# Altium PCB featherULP-2.PcbDoc
Units mm, origin at the board's own origin, x right, y up, seen from the top; angles counter-clockwise.
Board outline 50.04 x 22.86 mm, 2 copper layers (Top Layer, Bottom Layer); 28 components, 30 nets, 132 pads, 49 vias.
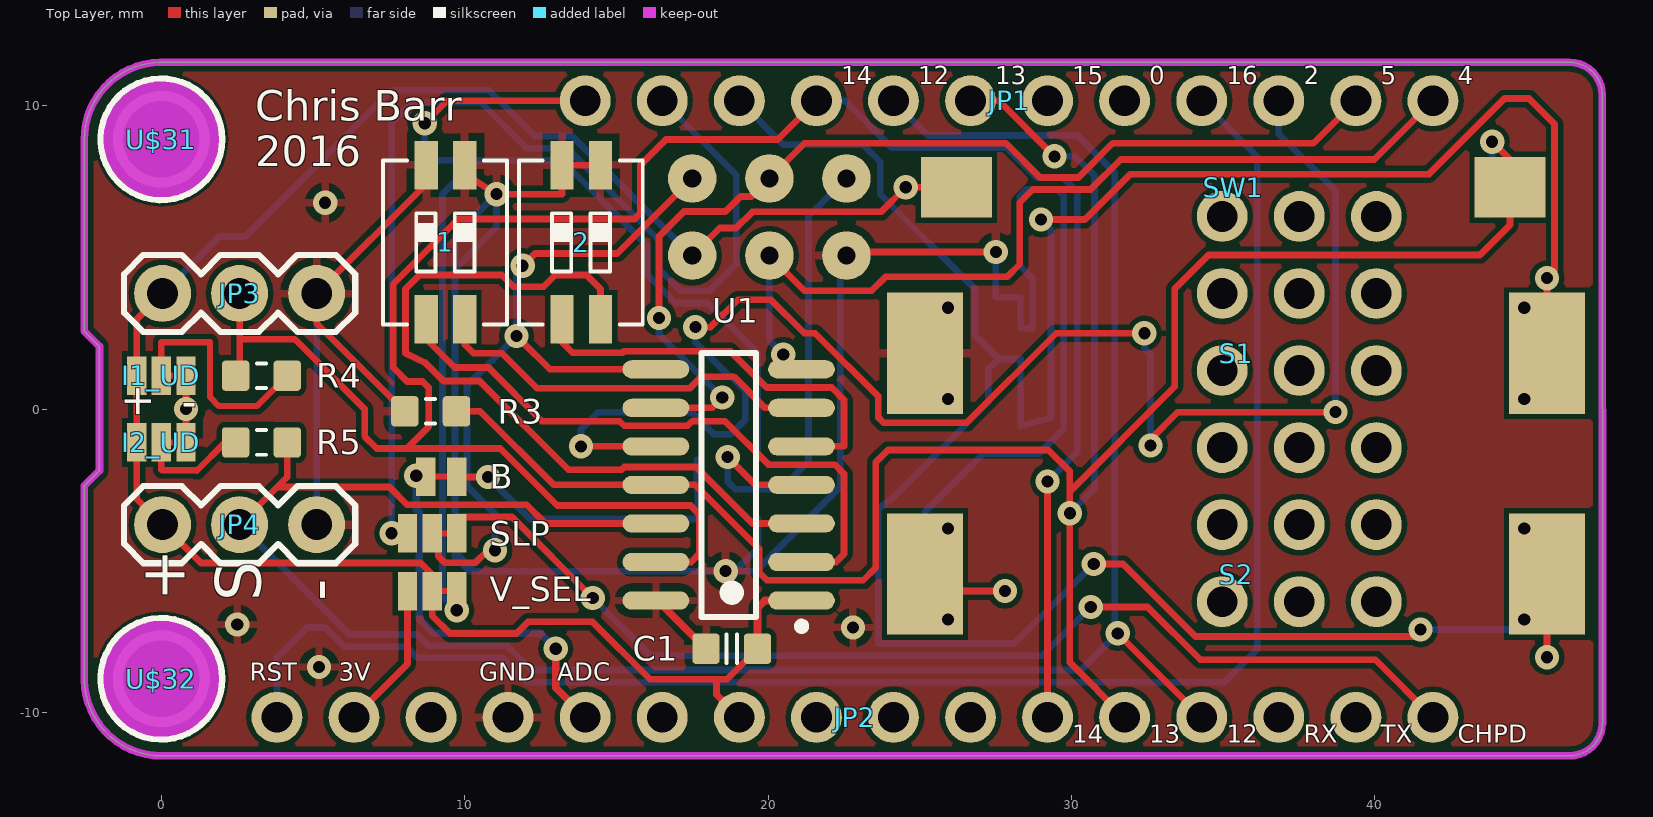
[diagram p0: Top Layer view]
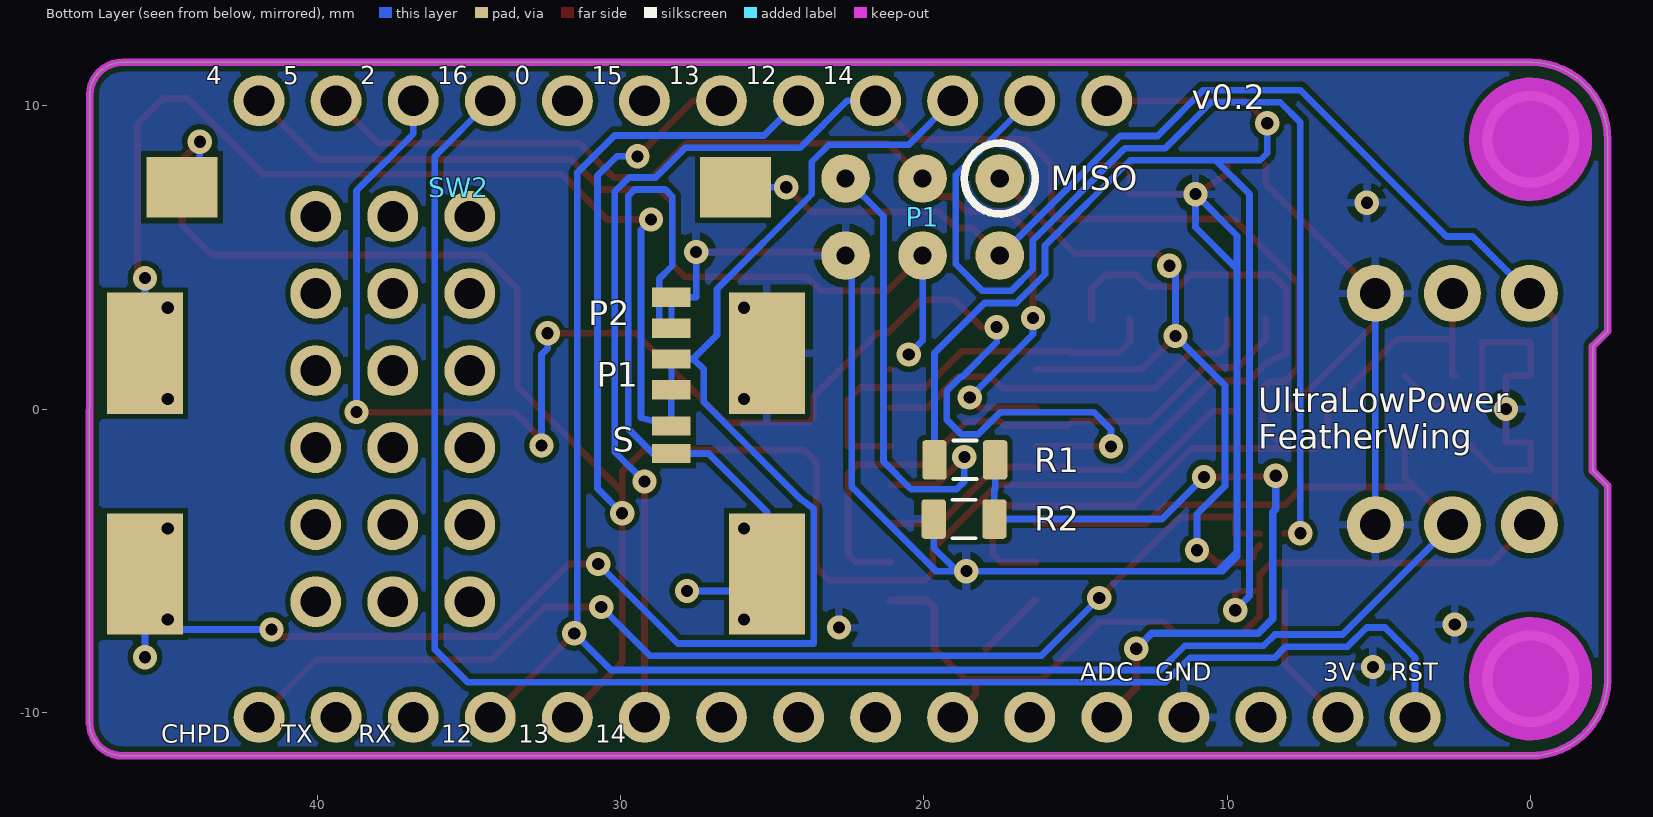
[diagram p1: Bottom Layer view, seen from below]

## Layer stack, top to bottom
Top Solder: solder mask 0.0102, Solder Resist, Dk 3.5
Top Layer: signal copper 0.0356
Dielectric1: dielectric 0.32, FR-4, Dk 4.8
Bottom Layer: signal copper 0.0356
Bottom Solder: solder mask 0.0102, Solder Resist, Dk 3.5

## Board outline
-2.54,-8.929 -2.54,-2.53 -2.04,-2.03 -2.04,2.07 -2.54,2.57 -2.54,8.87 cw(c0,8.89) -0.039,11.43 46.4,11.43 cw(c46.409,10.344) 47.494,10.361 47.5,-10.361 47.494,-10.361 cw(c46.409,-10.344) 46.4,-11.43 0.02,-11.43 cw(c0,-8.89)

## Design rules (kind name [scope] priority, off if disabled: settings)
Clearance [All] p1: gap=0.18
FabricationTestPointUsage TestPointUsage [All] p1: valid=0 allowmultiple=FALSE
FabricationTestpoint Testpoint [All] p1: side=3 testpointundercomponent=TRUE minsize=1.016 maxsize=2.54 preferedsize=1.524 minholesize=0 maxholesize=1.016 preferedholesize=0.813 testpointgrid=0.025 allowsidetop=TRUE allowsidebottom=TRUE usegrid=TRUE gridtolerance=0
HoleSize [All] p1: absolutevalues=TRUE maxlimit=3.5 minlimit=0.025 maxpercent=80.000 minpercent=20.000
PolygonConnect [All] p1: connectstyle=Relief reliefconductorwidth=0.254 reliefentries=4 polygonreliefangle="90 Angle" airgapwidth=0.254
RoutingVias [All] p1: holewidth=0.4 width=0.8 viastyle="Through Hole" minholewidth=0.25 minwidth=0.5 maxholewidth=1 maxwidth=1.4
SilkToSolderMaskClearance SilkscreenOverComponentPads [IsPad] p1: minsilkscreentomaskgap=0.254 clearancetoexposedcopper=TRUE
SolderMaskExpansion [All] p1: expansion=0.102
Width [All] p1: maxlimit=1 minlimit=0.2 preferedwidth=0.22 minimp=50.000000 maximp=50.000000 favimp=50.000000
26 further rules are at their usual default settings.

## Components (designator, comment, footprint, x,y, rotation, side; value= is the part's Value field where it differs from the comment)
1 "SMD dip switch 2 positions" CHS-02A 10,5.5 r180 top
2 "SMD dip switch 2 positions" CHS-02A 14.475,5.5 r180 top
B "JUMPER-PAD-2-NC_BY_TRACENO_SILK" PAD-JUMPER-2-NC_BY_TRACE_NO_SILK 9.225,-2.225 r180 top net-tie
C1 "approved sub OK" CAPC1608X90N 18.8,-7.9 r180 top
I1_UD "JUMPER-PAD-3-2OF3_NC_BY_TRACE_SMALL" PAD-JUMPER-3-2OF3_NC_BY_TRACE_YES_SILK_FULL_BOX 0,1.1 r0 top net-tie
I2_UD "JUMPER-PAD-3-2OF3_NC_BY_TRACE_SMALL" PAD-JUMPER-3-2OF3_NC_BY_TRACE_YES_SILK_FULL_BOX 0,-1.1 r0 top net-tie
JP1 "HEADER-1X12" 1X12_ROUND 27.94,10.16 r0 top locked
JP2 "HEADER-1X16ROUND" 1X16_ROUND 22.86,-10.16 r180 top locked
JP3 "Header 3Standard 3-pin 0.1\" header. Use with straight break away headers (SKU : PRT-00116), right angle break away headers (PRT-00553), swiss pins (PRT-00743), machine pins (PRT-00117), and female headers (PRT-00115). Molex polarized connector foot print use with SKU : PRT-08232 with associated crimp pins and housings." 1X03 5.12,3.81 r180 top
JP4 "Header 3Standard 3-pin 0.1\" header. Use with straight break away headers (SKU : PRT-00116), right angle break away headers (PRT-00553), swiss pins (PRT-00743), machine pins (PRT-00117), and female headers (PRT-00115). Molex polarized connector foot print use with SKU : PRT-08232 with associated crimp pins and housings." 1X03 5.12,-3.81 r180 top
P1 "JUMPER-PAD-2-NC_BY_TRACENO_SILK" PAD-JUMPER-2-NC_BY_TRACE_NO_SILK 28.321,1.143 r90 bottom net-tie
P1 "ICSP" "ICSP Pads - SMD" 17.5,7.6 r270 bottom
P2 "JUMPER-PAD-2-NC_BY_TRACENO_SILK" PAD-JUMPER-2-NC_BY_TRACE_NO_SILK 28.321,3.175 r90 bottom net-tie
R1 "Thick Film" RESC2012X70N 18.65,-1.675 r180 bottom
R2 "Thick Film" RESC2012X70N 18.675,-3.625 r0 bottom
R3 "Thick Film" RESC1608X55N 8.875,-0.075 r180 top
R4 "Thick Film" RESC1608X55N 3.3,1.1 r0 top
R5 "Thick Film" RESC1608X55N 3.3,-1.1 r180 top
S "JUMPER-PAD-2-NO" PAD-JUMPER-2-NO_NO_SILK 28.321,-1.016 r90 bottom net-tie
S1 "Solar Cell" "SOLAR CELL IXYS  KXOB22-01X8L-ND" 45.672,1.837 r180 top locked
S2 "Solar Cell" "SOLAR CELL IXYS  KXOB22-01X8L-ND" 45.672,-5.437 r180 top locked
SLP "JUMPER-PAD-3-2OF3_NC_BY_TRACE_SMALL" PAD-JUMPER-3-2OF3_NC_BY_TRACE_YES_SILK_FULL_BOX 8.925,-4.1 r0 top net-tie
SW1 "Reed Switch" "Reed Switch MDSM-4" 44.45,7.31 r180 top
SW2 "Reed Switch" "Reed Switch MDSM-4" 44.45,7.31 r180 bottom
U1 "ATtiny44A-SSU" 14S1_N 18.7,-2.5 r180 top
U$31 "MOUNTINGHOLE2.5" MOUNTINGHOLE_2.5_PLATED 0,8.89 r270 top
U$32 "MOUNTINGHOLE2.5" MOUNTINGHOLE_2.5_PLATED 0,-8.89 r270 top
V_SEL "JUMPER-PAD-3-2OF3_NC_BY_TRACE_SMALL" PAD-JUMPER-3-2OF3_NC_BY_TRACE_YES_SILK_FULL_BOX 8.925,-6 r0 top net-tie

## Footprints (in the part's own frame and the unit in brackets; to place one, negate y for a bottom-side part, rotate by r counter-clockwise, add the part's x,y. Pads: shape width x height; smd on the part's side, far side on the other; paste and mask are expansions set on the pad)
1X03 [mil]
  round 74 hole 40: 1(0,0) 2(100,0) 3(200,0)
  silkscreen extent -50,-50 250,50
1X12_ROUND [mil] "1X12_ROUND"
  round 66 hole 40: 1(-550,0) 2(-450,0) 3(-350,0) 4(-250,0) 5(-150,0) 6(-50,0) 7(50,0) 8(150,0) 9(250,0) 10(350,0) 11(450,0) 12(550,0)
1X16_ROUND [mil] "1X16_ROUND"
  round 66 hole 40: 1(-750,0) 2(-650,0) 3(-550,0) 4(-450,0) 5(-350,0) 6(-250,0) 7(-150,0) 8(-50,0) 9(50,0) 10(150,0) 11(250,0) 12(350,0) 13(450,0) 14(550,0) 15(650,0) 16(750,0)
14S1_N [mm] "SOIC, 14-Leads, Body 8.7x3.9mm, Pitch 1.27mm, IPC Medium Density"
  oval 2.2x0.6 smd: 1(-2.4,3.81) 2(-2.4,2.54) 3(-2.4,1.27) 4(-2.4,0) 5(-2.4,-1.27) 6(-2.4,-2.54) 7(-2.4,-3.81) 8(2.4,-3.81) 9(2.4,-2.54) 10(2.4,-1.27) 11(2.4,0) 12(2.4,1.27) 13(2.4,2.54) 14(2.4,3.81)
  silkscreen extent -2.53,-4.35 0.9,4.78, body extent -1.99,-4.37 1.99,4.37, height 1.75
CAPC1608X90N [mm] "Chip Capacitor, Body 1.6x0.8mm, EIA 0603, IPC Medium Density"
  round 0.254 on Mech15: 0(0,0)
  rrect25% 0.9x1 smd: 1(-0.85,0) 2(0.85,0)
  Top Layer pour cut-out: -0.6,0.5 -0.4,0.7 0.4,0.7 0.6,0.5 0.6,-0.5 0.4,-0.7 -0.4,-0.7 -0.6,-0.5
  silkscreen extent -0.18,-0.48 0.18,0.48, body extent -0.85,-0.45 0.85,0.45, height 0.89
CHS-02A [mil]
  rect 30x63 smd: 1(0,-100) 2(50,-100) 3(50,100) 4(0,100)
  silkscreen extent -55,-106 106,107
"ICSP Pads - SMD" [mm]
  round 1.6 hole 0.6: 1(0,0) 2(2.54,0) 3(0,-2.54) 4(2.54,-2.54) 5(0,-5.08) 6(2.54,-5.08)
  silkscreen extent -1.17,-1.17 1.17,1.17
MOUNTINGHOLE_2.5_PLATED [mil] "MOUNTINGHOLE_2.5_PLATED"
  round 126 hole 99: P$1(0,0)
  Top Layer keep-out circle w80: c0,0 r40
  Bottom Layer keep-out circle w80: c0,0 r40
  silkscreen extent -79,-79 79,79
PAD-JUMPER-2-NC_BY_TRACE_NO_SILK [mil]
  rect 25x50 smd: 1(-20,0) 2(20,0)
  Top Layer lines w8: 15,0 -15,0
PAD-JUMPER-2-NO_NO_SILK [mm]
  rect 0.635x1.27 smd: 1(-0.45,0) 2(0.457,0)
PAD-JUMPER-3-2OF3_NC_BY_TRACE_YES_SILK_FULL_BOX [mil]
  rect 25x50 smd: 1(-32,0) 2(0,0) 3(32,0)
  Top Layer lines w8: 0,0 25,0
"Reed Switch MDSM-4" [mm]
  rect 2.34x2 smd: 0(0,0) 1(18.25,0)
RESC1608X55N [mm] "Chip Resistor, Body 1.6x0.8mm, EIA 0603, IPC Medium Density"
  round 0.254 on Mech15: 0(0,0)
  rrect25% 0.9x1 smd: 1(-0.85,0) 2(0.85,0)
  Top Layer pour cut-out: -0.6,0.5 -0.4,0.7 0.4,0.7 0.6,0.5 0.6,-0.5 0.4,-0.7 -0.4,-0.7 -0.6,-0.5
  silkscreen extent -0.15,-0.41 0.15,0.41, body extent -0.87,-0.47 0.88,0.48, height 0.54
RESC2012X70N [mm] "Chip Resistor, Body 2.0x1.2mm, EIA 0805, IPC Medium Density"
  round 0.254 on Mech15: 0(0,0)
  rrect25% 0.8x1.3 smd: 1(-1,0) 2(1,0)
  Top Layer pour cut-out: -0.725,0.65 -0.525,0.85 0.525,0.85 0.725,0.65 0.725,-0.65 0.525,-0.85 -0.525,-0.85 -0.725,-0.65
  silkscreen extent -0.38,-0.63 0.38,0.64, body extent -1.1,-0.67 1.1,0.68, height 0.69
"SOLAR CELL IXYS  KXOB22-01X8L-ND" [mm]
  rect 2.5x4 smd far side: +(0,0) -(20.5,0)
  rect 2.5x4 smd: +(0,0) -(20.5,0)
  body extent -0.75,-3.5 21.25,3.5, height 1.5

## Part data
1 2: library part 2-POS-DIP
C1: library part CAPC_100n_0603_X7R_50V_10%, "Capacitor SMD Cer 100nF 10% 50V X7R 0603"
JP2: "PIN HEADER"
JP3 JP4: library part M03PTH
P1: library part "Header 3X2", "Header, 3-Pin, Dual row"
R1: library part RES_1M_0805_5%, "Resistor SMD chip 1M Ohm 0.125W 5% 0805"
R2: library part RES_205K_0805_1%, "Resistor SMD chip 205k Ohm 0.125W 1% 0805"
R3 R4 R5: library part RES_10K_0603_5%, "Resistor SMD chip 10k Ohm 0.1W 5% 0603"
U1: "8-bit AVR Microcontroller,  20MHz, 1.8-5.5V, 4KB Flash, 256 Bytes EEPROM, 256 Bytes SRAM, 14-pin SOIC, Industrial Grade (-40°C to 85°C), Pb-Free"
U$31 U$32: "Mounting Hole   For #2 screws (0.086\"/2.18mm width, 0.094\"/2.4mm hole) use 2.5mm"

## Free pads (board coordinates)
  round 1.676 hole 1.016: ""(34.965,-6.35) ""(34.965,-3.81) ""(34.965,-1.27) ""(34.965,1.27) ""(34.965,3.81) ""(34.965,6.35) ""(37.505,-6.35) ""(37.505,-3.81) ""(37.505,-1.27) ""(37.505,1.27) ""(37.505,3.81) ""(37.505,6.35) ""(40.045,-6.35) ""(40.045,-3.81) ""(40.045,-1.27) ""(40.045,1.27) ""(40.045,3.81) ""(40.045,6.35)

## Via types
v1: diameter 0.8, hole 0.4, Top Layer to Bottom Layer, tented both sides, 49 vias

## Nets (pads, with @x,y where several pads share a name; then routed paths per layer and width w, separated by ;. In a path a pad name is that pad's centre, name@x,y a point inside that pad or via, vN(x,y) a via of type N, cw(c..) or ccw(c..) an arc to the next point about the centre after c; other vN are vias at no path point)
+3V3: JP2.15 V_SEL.1 | length 4.9
  Top Layer w0.22: JP2.15 8.112,-8.398 V_SEL.1
ADC: B.2 JP2.12 | length 12.3
  Top Layer w0.25: v1(13,-7.9) 13,-9.19 JP2.12
  Bottom Layer w0.25: v1(8.4,-2.2) 8.4,-3.3 8.5,-3.4 8.5,-6.913 8.972,-7.385 12.485,-7.385 v1(13,-7.9)
CH_PD: JP2.1 SLP.3 | length 36.8
  Top Layer w0.22: SLP.3 9.738,-3.559 11.554,-3.559 v1(14.221,-6.226) ; v1(30.633,-6.527) 32.509,-6.527 34.24,-8.258 40.008,-8.258 JP2.1
  Bottom Layer w0.22: v1(14.221,-6.226) 16.122,-8.127 29.033,-8.127 v1(30.633,-6.527)
EN: JP1.2 SLP.1 | length 35.6
  Top Layer w0.22: v1(7.591,-4.093) 8.112,-4.093 SLP.1
  Bottom Layer w0.22: v1(7.591,-4.093) 7.591,9.45 8.252,10.11 10.53,10.11 12.039,8.601 13.365,8.601 16.41,5.556 16.41,4.608 17.122,3.897 18.07,3.897 18.945,4.772 18.945,7.725 JP1.2
FEEDBACK: JP1.10 U1.10 | length 53
  Top Layer w0.22: v1(13.83,-1.23) U1.10 ; v1(17.6,2.7) 18.1,2.7 19,3.6 20.1,3.6 21.2,2.5 21.544,2.5 23.632,0.412 23.632,-0.283 23.802,-0.453 26.542,-0.453 29.495,2.5 v1(32.4,2.5) ; v1(32.6,-1.2) 32.6,-1 33.5,-0.1 v1(38.7,-0.1)
  Bottom Layer w0.22: v1(13.83,-1.23) 13.83,-0.67 14.4,-0.1 17.477,-0.1 18.202,-0.825 18.775,-0.825 19.25,-0.35 19.25,0.592 18.774,1.068 18.732,1.068 17.6,2.2 v1@17.6,2.5 ; v1(32.4,2.5) 32.4,2 32.6,1.8 v1(32.6,-1.2) v1@32.6,-1.5 ; JP1.10 36.83,9.07 38.7,7.2 v1(38.7,-0.1)
GND: 1.1 1.2 2.1 2.2 C1.2 I1_UD.3 I2_UD.3 JP2.13 JP3.1 JP4.1 P1.6 P2.2 R2.2 R3.2 S1.- U1.14 | length 85.9
  Top Layer w0.22: I2_UD.3 I1_UD.3 ; R3.2 5.12,2.83 JP3.1 8.73,7.42 1.2 ; 1.1 10,7.744 v1(11.046,7.083) ; v1(11.047,7.085) 13.205,7.085 2.2 2.1 ; U1.14 U1.14@16.36,-6.31 ; P1.6@22.878,5.178 v1(27.505,5.178)
  Top Layer w0.25: U1.14@16.36,-6.31 C1.2
  Bottom Layer w0.22: JP4.1 JP3.1 ; v1(11.047,7.085) v1(11.046,7.083) ; JP2.13 JP2.13@11.43,-9.63 ; R2.2 19.675,-4.575 v1@18.909,-5.341 ; P1.6 22.374,4.854 22.374,-2.569 19.601,-5.341 v1@18.909,-5.341 ; v1(27.505,5.178) 27.505,3.683 P2.2 ; 9.676,4.622 11.046,5.991 v1(11.046,7.083) ; 9.676,4.622 9.674,4.62 9.674,-4.859 10.157,-5.341 10.305,-5.341 ; 9.676,4.622 9.676,5.714 v1(11.046,7.083) ; 9.676,4.622 9.676,-4.713 10.305,-5.341 ; 10.305,-5.341 v1@18.909,-5.341
  other v1: 5.2,-8.5 22.8,-7.2 2.5,-7.1 18.6,-5.341 0.813,0 25.922,0.337 25.922,3.337 5.4,6.8
GPIO0: JP1.8
GPIO4/SDA: JP1.12 P1.4 U1.7 | length 29.8
  Top Layer w0.22: P1.4@19.86,5.06 P1.4 21.2,3.9 23.407,3.9 23.865,4.358 27.878,4.358 28.292,4.772 28.292,6.804 28.722,7.234 30.628,7.234 31.621,8.226 39.976,8.226 JP1.12 ; U1.7@21.087,1.31 U1.7
  Bottom Layer w0.22: P1.4 20.04,2.26 v1(20.5,1.8)
GPIO5/SCL: JP1.11 P1.3 U1.9 | length 34.7
  Top Layer w0.22: U1.9 18.15,0.04 v1(18.488,0.378) ; v1(16.4,3) 16.4,2.796 16.405,2.791 16.405,5.686 17.229,6.51 18.59,6.51 19.087,7.007 19.447,7.007 P1.3 21.2,8.76 27.836,8.76 28.962,7.634 30.228,7.634 31.354,8.76 37.97,8.76 JP1.11
  Bottom Layer w0.22: v1(16.4,3) 16.4,2.466 v1(18.488,0.378)
GPIO12/MISO: JP1.5 JP2.4 JP4.2 R5.1 U1.12 | length 75.2
  Top Layer w0.22: JP4.2 3.821,-2.569 ; R5.1 4.15,-2.24 3.821,-2.569 ; U1.12 12.659,-3.77 12.041,-3.153 8.099,-3.153 7.515,-2.569 3.821,-2.569 ; v1(31.521,-7.391) JP2.4
  Bottom Layer w0.22: JP4.2 6.2,-7.43 8.43,-7.43 8.8,-7.8 11.4,-7.8 12.2,-8.6 30.313,-8.6 v1@31.421,-7.492 ; JP1.5 25.272,9.018 30.2,9.018 31.418,7.8 31.421,7.8 v1@31.421,-7.492 ; v1(31.521,-7.391) v1@31.421,-7.492
GPIO13/MOSI: JP1.6 JP2.5 R3.1 SW1.0 SW2.0 U1.11 | length 83.3
  Top Layer w0.22: R3.1 10.512,-0.075 12.937,-2.5 U1.11 17.599,-2.5 19.707,-4.608 19.707,-5.388 19.961,-5.642 23.136,-5.642 23.543,-5.236 23.543,-1.756 23.949,-1.349 29.232,-1.349 29.943,-2.061 29.943,-2.721 ; JP1.6 27.607,10.16 v1(29.439,8.328) ; JP2.5 29.943,-8.353 ; v1(43.863,8.811) 44.45,8.223 SW1.0 44.45,6.071 43.456,5.077 34.515,5.077 33.398,3.959 33.398,0.733 29.943,-2.721 ; 29.943,-8.353 29.943,-2.721 ; 29.943,-8.353 v1(29.943,-3.432) 29.943,-2.721
  Bottom Layer w0.22: v1(29.439,8.328) 30.121,8.328 30.756,7.693 30.756,-2.619 v1(29.943,-3.432) ; v1(43.863,8.811) 43.863,7.31 SW2.0
GPIO14/SCK: JP1.4 JP2.6 JP3.2 R4.1 U1.13 | length 76.2
  Top Layer w0.22: R4.1 2.58,1.1 2.58,2.3 ; JP3.2 2.58,2.3 ; 7.099,-1.3 11.172,-1.3 13.05,-3.178 17.447,-3.178 17.726,-3.458 17.726,-4.778 17.464,-5.04 U1.13 ; JP1.4 20.317,8.887 16.634,8.887 15.796,8.049 15.796,6.461 15.596,6.262 9.786,6.262 7.642,4.119 7.642,1.368 8.099,0.911 8.607,0.911 8.811,0.708 8.811,-0.587 8.099,-1.299 7.099,-1.299 6.7,-0.9 6.7,0 4.4,2.3 2.58,2.3 ; JP2.6 v1(29.21,-2.388)
  Bottom Layer w0.22: JP1.4 22.534,10.16 24.087,8.607 27.873,8.607 28.847,7.634 29.72,7.634 30.191,7.163 30.191,-1.407 v1(29.21,-2.388)
GPIO15: JP1.7
GPIO16: JP1.9 JP2.16 | length 54.7
  Bottom Layer w0.22: JP2.16 3.81,-8.19 4.8,-7.2 5.404,-7.2 6.034,-7.83 8.077,-7.83 8.447,-8.2 11.234,-8.2 12.034,-9 35.044,-9 36.116,-7.928 36.116,8.334 JP1.9
MISO: P1.1@17.5,7.6 SLP.2 U1.8 | length 25.2
  Top Layer w0.22: SLP.2@8.925,-4.492 9.13,-4.697 9.13,-4.855 9.338,-5.063 10.358,-5.063 10.769,-4.651 v1(10.995,-4.651) ; v1(11.909,4.721) 12.316,5.128 15.028,5.128 P1.1@17.5,7.6 ; U1.8 12.806,1.31 v1@11.909,2.207 ; v1@11.909,2.207 v1(11.706,2.41) v1@11.909,2.207
  Bottom Layer w0.22: v1(10.995,-4.651) 10.995,-3.458 10.076,-2.539 10.076,0.78 v1(11.706,2.41) 11.706,4.518 v1(11.909,4.721)
NetB_1: B.1 R1.2 R2.1 | length 10.5
  Top Layer w0.22: B.1 9.733,-2.238 v1(10.766,-2.238)
  Bottom Layer w0.22: v1(10.766,-2.238) 12.153,-3.625 R2.1 17.675,-2.67 17.65,-2.645 R1.2
NetI1_UD_2: I1_UD.2 R4.2 | length 7.6
  Top Layer w0.203: I1_UD.2 0,2.2 1.6,2.2 1.6,0.4 1.9,0.1 3.15,0.1 R4.2
NetI2_UD_2: I2_UD.2 R5.2 | length 3.8
  Top Layer w0.203: I2_UD.2 0,-2 0.017,-2.017 1.147,-2.017 1.165,-2.035
  Top Layer w0.22: 1.165,-2.035 2.1,-1.1 R5.2
NetP1_1: P1.1@28.321,0.635 S1.+ S.2 | length 38
  Top Layer w0.22: v1(28.991,6.245) 30.439,6.245 31.938,7.744 41.78,7.744 44.269,10.233 45.082,10.233 45.92,9.395 45.92,4.563 v1(45.672,4.315) S1.+@45.672,1.837
  Bottom Layer w0.22: P1.1@28.321,0.635 S.2 29.325,-0.292 29.325,5.912 v1(28.991,6.245) ; S1.+@45.672,1.837 v1(45.672,4.315)
  other v1: 44.922,0.337 44.922,3.337
NetP2_1: P2.1 S2.- S.1 | length 28.4
  Top Layer w0.22: S2.-@25.172,-5.437 25.172,-5.998 v1(27.81,-5.998)
  Bottom Layer w0.22: v1(27.81,-5.998) 25.172,-5.998 25.172,-5.437 25.172,-3.393 27.099,-1.466 S.1 28.927,-1.466 29.74,-0.653 29.74,7.033 29.539,7.234 28.519,7.234 28.292,7.007 28.292,4.721 28.724,4.289 28.724,2.667 P2.1
  other v1: 25.922,-6.937 25.922,-3.937
RST: P1.5 U1.4 | length 16.6
  Top Layer w0.22: v1(18.666,-1.578) 19.588,-2.5 U1.4
  Bottom Layer w0.22: v1(18.666,-1.578) 18.666,-2.391 18.92,-2.645 20.418,-2.645 21.333,-1.73 21.333,6.353 P1.5
RXD: JP2.3
TIMER_SET_1: 1.4 U1.6 | length 13.1
  Top Layer w0.22: 1.4 10,2.13 10.296,1.835 11.236,1.835 12.388,0.683 17.413,0.683 17.798,1.068 18.869,1.068 19.897,0.04 U1.6
TIMER_SET_2: 1.3 U1.2 | length 20.5
  Top Layer w0.22: 1.3 8.73,2.308 9.67,1.368 10.778,1.368 12.546,-0.4 15.106,-0.4 15.256,-0.55 17.344,-0.55 17.494,-0.4 18.58,-0.4 20.012,-1.832 22.196,-1.832 22.501,-2.137 22.501,-4.778 22.24,-5.04 U1.2
TIMER_SET_3: 2.4 U1.3 | length 25.6
  Top Layer w0.22: 2.4 14.475,3.959 14.018,4.416 12.985,4.416 12.599,4.031 11.605,4.031 11.219,4.416 8.506,4.416 8.049,3.959 8.049,1.839 8.707,1.523 9.304,0.926 10.49,0.926 13.416,-2 15.166,-2 15.256,-1.91 17.625,-1.91 19.485,-3.77 U1.3
TIMER_SET_4: 2.3 U1.5 | length 13.8
  Top Layer w0.22: 2.3 13.205,2.207 13.561,1.851 15.186,1.851 15.237,1.902 18.757,1.902 19.951,0.708 22.095,0.708 22.501,0.302 22.501,-1.23 U1.5
TXD: JP2.2
V_SEL: C1.1 I1_UD.1 I2_UD.1 JP2.10 JP3.3 JP4.3 P1.2@17.5,5.06 SW1.1 SW2.1 U1.1 V_SEL.2 | length 69.8
  Top Layer w0.22: JP3.3 -0.813,2.957 I1_UD.1 I2_UD.1 -0.813,-2.957 JP4.3 1.305,-5.075 8.55,-5.075 8.925,-5.45 V_SEL.2 8.925,-6.81 9.515,-7.4 11.7,-7.4 12.086,-7.014 14.214,-7.014 16.1,-8.9 18.3,-8.9 ; P1.2@17.5,5.06 18.406,5.966 18.945,5.966 19.479,6.499 23.722,6.499 v1(24.533,7.31) SW1.1 ; JP2.10 18.3,-9.41 18.3,-8.9 ; C1.1 18.65,-8.9 18.3,-8.9
  Top Layer w0.25: C1.1 19.65,-6.545 19.885,-6.31 U1.1
  Bottom Layer w0.22: JP3.3 1.916,5.686 2.77,5.686 7.594,10.51 10.792,10.51 12.301,9.001 13.53,9.001 17.471,5.06 P1.2@17.5,5.06 ; v1(24.533,7.31) SW2.1
VBAT: JP1.1 R1.1 V_SEL.3 | length 40.5
  Top Layer w0.22: v1(8.684,9.42) 9.423,10.16 JP1.1 ; v1(9.738,-6.633) V_SEL.3
  Bottom Layer w0.22: v1(8.684,9.42) 8.684,8.43 8.912,8.201 10.385,8.201 ; v1(9.738,-6.633) 9.268,-6.163 9.268,7.083 10.385,8.201 ; R1.1 19.65,1.85 18.003,3.497 16.956,3.497 16.01,4.443 16.01,5.39 13.199,8.201 10.385,8.201
VBUS: JP1.3 P1.2@28.321,1.651 S2.+ | length 55.1
  Top Layer w0.22: v1(30.731,-5.109) 31.696,-5.109 34.084,-7.496 41.272,-7.496 v1(41.5,-7.268) ; v1(45.672,-8.182) S2.+@45.672,-5.437
  Bottom Layer w0.22: JP1.3 20.501,8.709 23.136,8.709 23.695,8.15 23.695,7.079 26.815,3.959 26.815,2.443 27.607,1.651 ; P1.2@28.321,1.651 27.607,1.651 ; v1(30.731,-5.109) 28.112,-7.727 23.632,-7.727 23.632,-3.292 24.051,-2.975 27.251,0.225 27.251,1.318 27.607,1.651 ; v1(41.5,-7.268) S2.+@45.672,-7.268 ; v1(45.672,-8.182) S2.+@45.672,-7.268 ; S2.+@45.672,-5.437 S2.+@45.672,-7.268
  other v1: 44.922,-6.937 44.922,-3.937
pads on no net: C1.0 JP2.7 JP2.8 JP2.9 JP2.11 JP2.14 R1.0 R2.0 R3.0 R4.0 R5.0 U$31.P$1 U$32.P$1

## Polygon pours and split planes (outlines as drawn)
GND on Bottom Layer "Bottom Layer-GND" (solid, pour order 0): -2.54,11.43 -2.54,-11.43 47.494,-11.43 47.494,11.43
GND on Top Layer "Bottom Layer-GND" (solid, pour order 2): -2.54,11.43 -2.54,-11.43 47.494,-11.43 47.494,11.43

## Keep-outs
Keep-Out Layer:
  lines w0.254: -0.039,11.43 ccw(c0,8.89) -2.54,8.87 -2.54,2.57 -2.04,2.07 -2.04,-2.03 -2.54,-2.53 -2.54,-8.929 ccw(c0,-8.89) 0.02,-11.43 46.4,-11.43 ccw(c46.409,-10.344) 47.494,-10.361 ; -0.039,11.43 46.4,11.43 cw(c46.409,10.344) 47.494,10.361 47.5,-10.361

## Silkscreen, mask and mechanical layers (free items; w line width, h text height)
Top Overlay:
  text "14" at 22.407,10.515 h1
  text "12" at 24.947,10.515 h1
  text "13" at 27.487,10.515 h1
  text "15" at 30.027,10.515 h1
  text "0" at 32.567,10.515 h1
  text "16" at 35.107,10.515 h1
  text "2" at 37.647,10.515 h1
  text "5" at 40.187,10.515 h1
  text "4" at 42.727,10.515 h1
  text "Chris Barr / 2016" at 3.1,8.01 h1
  text "-" at 1.175,0.5 h1 r180
  text "+" at -0.325,-0.325 h1 r90
  text "+" at 0.78,-6.34 h1.5 r90
  text "S" at 3.28,-6.34 h1.5 r90
  text "-" at 5.88,-6.34 h1.5 r90
  text "RST" at 2.91,-9.16 h1
  text "3V" at 5.84,-9.16 h1
  text "GND" at 10.48,-9.16 h1
  text "ADC" at 13.05,-9.16 h1
  text "14" at 30.027,-11.195 h1
  text "13" at 32.567,-11.195 h1
  text "12" at 35.107,-11.195 h1
  text "RX" at 37.647,-11.195 h1
  text "TX" at 40.187,-11.195 h1
  text "CHPD" at 42.727,-11.195 h1
Bottom Overlay:
  text "14" at 23.331,10.515 h1
  text "12" at 25.871,10.515 h1
  text "13" at 28.411,10.515 h1
  text "15" at 30.951,10.515 h1
  text "0" at 33.491,10.515 h1
  text "16" at 36.031,10.515 h1
  text "2" at 38.571,10.515 h1
  text "5" at 41.111,10.515 h1
  text "4" at 43.651,10.515 h1
  text "v0.2" at 11.175,9.875 h0.8
  text "MISO" at 15.815,7.215 h0.8
  text "UltraLowPower / FeatherWing" at 8.974,-1.3 h0.8
  text "RST" at 4.61,-9.16 h1
  text "3V" at 6.84,-9.16 h1
  text "GND" at 12.38,-9.16 h1
  text "ADC" at 14.85,-9.16 h1
  text "14" at 30.827,-11.195 h1
  text "13" at 33.367,-11.195 h1
  text "12" at 35.907,-11.195 h1
  text "RX" at 38.647,-11.195 h1
  text "TX" at 41.187,-11.195 h1
  text "CHPD" at 45.127,-11.195 h1
Mechanical 4:
  lines w0.254: 7.25,-8.93 43.5,-8.93 43.5,9.07 7.25,9.07 7.25,-8.93
Mechanical 16:
  drawing of 1879 lines, arcs and shapes, not listed
  text "1" at -97.285,73.479 h1.78
  text "2" at -24.641,73.479 h1.78
  text "3" at 48.511,73.479 h1.78
  text "4" at 121.409,73.479 h1.78
  text "A" at -131.626,50.467 h1.78
  text "A" at 155.394,50.467 h1.78
  text "B" at -131.626,2.41 h1.78
  text "B" at 155.394,2.41 h1.78
  text "C" at -131.626,-46.104 h1.78
  text "C" at 155.394,-46.104 h1.78
  text "ENGINEER:" at 40.459,-83.112 h1.14
  text "TITLE:" at 78.559,-83.112 h1.14
  text "PCB DESIGNER:" at 40.459,-90.605 h1.14
  text "D" at -131.626,-94.11 h1.78
  text "D" at 155.394,-94.11 h1.78
  text "DATE:" at 40.459,-98.352 h1.14
  text "PART NO.:" at 78.559,-98.352 h1.14
  text "REV:" at 131.899,-98.352 h1.14
  text "Altium Limited" at 7.439,-100.892 h1.78
  text ".PRINT_DATE" at 41.729,-101.4 h1.78
  text "12a Rodborough Rd" at 7.439,-103.432 h1.78
  text "Frenchs Forest" at 7.439,-105.972 h1.78
  text "FILE NAME:" at 40.459,-105.972 h1.14
  text "DWG NO:" at 78.559,-105.972 h1.14
  text "SCALE:" at 131.899,-105.972 h1.14
  text "NSW 2086" at 7.439,-108.512 h1.78
  text ".PCB_FILE_NAME_NO_PATH" at 41.729,-109.02 h1.78
  text "1" at -97.285,-114.481 h1.78
  text "2" at -24.641,-114.481 h1.78
  text "3" at 48.511,-114.481 h1.78
  text "4" at 121.409,-114.481 h1.78

## Dimensions
-2.54,8.87 to 47.494,10.361 on Mechanical 12
0,8.89 to 0,-8.89 on Mechanical 12
1.905,11.43 to 2.235,-11.43 on Mechanical 12
7.25,9.07 to 7.25,-8.93 on Mechanical 4
7.25,9.07 to 43.5,9.07 on Mechanical 4

## Text inside footprints (layer, text, board x,y; h text height)
1: Mechanical 16 "O" at 9.67,3.9 h1.26 r270; Mechanical 16 "N" at 8.4,3.9 h1.26 r270; Mechanical 16 "2" at 8.4,7.405 h1.26 r270
2: Mechanical 16 "O" at 14.145,3.9 h1.26 r270; Mechanical 16 "N" at 12.875,3.9 h1.26 r270; Mechanical 16 "1" at 14.145,7.405 h1.26 r270